# EAGLE board Copy of Project Filnal- Traffic light control 555 timer ic. (EAGLE 9.7.0)

Size 74.64 x 76.45 mm. Coordinates in mm from the lower left corner, seen from the top.
Outline: 0,0 74.64,0 74.64,76.45 0,76.45 0,0
Copper layers (1*16): Top 0.035mm / dielectric 1.5mm / Bottom 0.035mm
Design rules "default": minimum track width 6mil, minimum drill 0.35mm, track to track 6mil, track to pad 6mil, pad to pad 6mil, via to via 6mil, smd to smd 6mil, copper to edge 40mil, drill to drill 6mil, minimum pad ring 10mil, minimum via ring 8mil, stop-mask expansion 4mil, vias tented up to drill 0mil, thermal gap 10mil

## Footprints (pad centres in the part's own frame; a part is rotated, then mirrored left to right if it is on the bottom)
CAPPRD254W65D500H1150B = drill 0.85 pad 1.45: 1 -1.27,0; 2 1.27,0
LEDRD254W60D565H860B = drill 0.981 pad 1.581: 1 -1.27,0; 2 1.27,0
LEDRD254W60D565H860B_Y = drill 0.981 pad 1.581: 1 -1.27,0; 2 1.27,0
LEDRD254W60D565H860B_G = drill 0.981 pad 1.581: 1 -1.27,0; 2 1.27,0
BATTERY-GENERIC = drill 1.118 pad 3.15 octagon: + 2.54,0; - -2.54,0
RESAD1016W63L850D250B = drill 0.83 pad 1.43: 1 -5.08,0; 2 5.08,0
DIP826W53P254L959H508Q8B = drill 0.786 pad 1.386: 1 -4.13,3.81; 2 -4.13,1.27; 3 -4.13,-1.27; 4 -4.13,-3.81; 5 4.13,-3.81; 6 4.13,-1.27; 7 4.13,1.27; 8 4.13,3.81

## Placement (x,y rotation side)
C1  100u  [CAPPRD254W65D500H1150B]  11.17,7.58 0 top
C2  100u  [CAPPRD254W65D500H1150B]  39.53,7.89 0 top
D1  RED  [LEDRD254W60D565H860B]  58.42,48.17 180 top
D2  YELLOW  [LEDRD254W60D565H860B_Y]  63.5,48.17 180 top
D3  GREEN  [LEDRD254W60D565H860B_G]  68.58,48.17 180 top
P1  BATTERYGENERIC  [BATTERY-GENERIC]  10.19,68.19 180 top
R1  100k  [RESAD1016W63L850D250B]  21.59,38.01 270 top
R2  47k  [RESAD1016W63L850D250B]  29.21,38.01 90 top
R3  390  [RESAD1016W63L850D250B]  57.15,30.39 90 top
R4  1k  [RESAD1016W63L850D250B]  49.53,43.09 0 top
R5  330  [RESAD1016W63L850D250B]  67.31,35.47 90 top
U1  LM555_DIP  [DIP826W53P254L959H508Q8B]  10.16,36.74 90 top
U2  LM555_DIP  [DIP826W53P254L959H508Q8B]  38.1,36.74 90 top

## Library data of the parts
C1 C2 P1 R1-R5 = Tinkercad
D1 = Tinkercad; CATEGORY: Opto-Electronic; SUB-CATEGORY: LED; VALUE: LED_RED
D2 = Tinkercad; CATEGORY: Opto-Electronic; SUB-CATEGORY: LED; VALUE: LED_YELLOW
D3 = Tinkercad; CATEGORY: Opto-Electronic; SUB-CATEGORY: LED; VALUE: LED_GREEN
U1 U2 = Tinkercad; CATEGORY: IC_Clock-Timing; CURRENT-SUPPLY: 10mA; DESCRIPTION: IC OSC SINGLE TIMER 100KHZ 8-DIP; FREQUENCY: 100kHz; MANUFACTURER: Texas Instruments; MPN: LM555CN/NOPB; OPERATING_TEMP: 0°C to 70°C; PART_STATUS: Active; ROHS_COMPLIANT: ROHS3 Compliant; SUB-CATEGORY: Timer

## Nets
D1_C: D1.2 R3.2
D2_C: D2.2 R4.2
D3_C: D3.2 R5.2
P1+: D1.1 D2.1 P1.+ U1.4 U1.8 U2.4
P1-: C1.2 C2.2 P1.- R5.1 U1.1 U2.1
U1_OUT: R1.2 R3.1 U1.3 U2.8
U1_THR: C1.1 R1.1 U1.2 U1.6
U2_DIS: R4.1 U2.7
U2_OUT: D3.1 R2.1 U2.3
U2_THR: C2.1 R2.2 U2.2 U2.6

## Tracks (layer width: path | path; a pad name or v marks a point on that pad's centre or on a via)
D1_C  (1 unrouted)
D2_C  (1 unrouted)
D3_C  (1 unrouted)
P1+  (5 unrouted)
P1-  (5 unrouted)
U1_OUT  (3 unrouted)
U1_THR  (3 unrouted)
U2_DIS  (1 unrouted)
U2_OUT  (2 unrouted)
U2_THR  (3 unrouted)